# EAGLE board PCB_BALISE_328P (EAGLE 9.5.2)
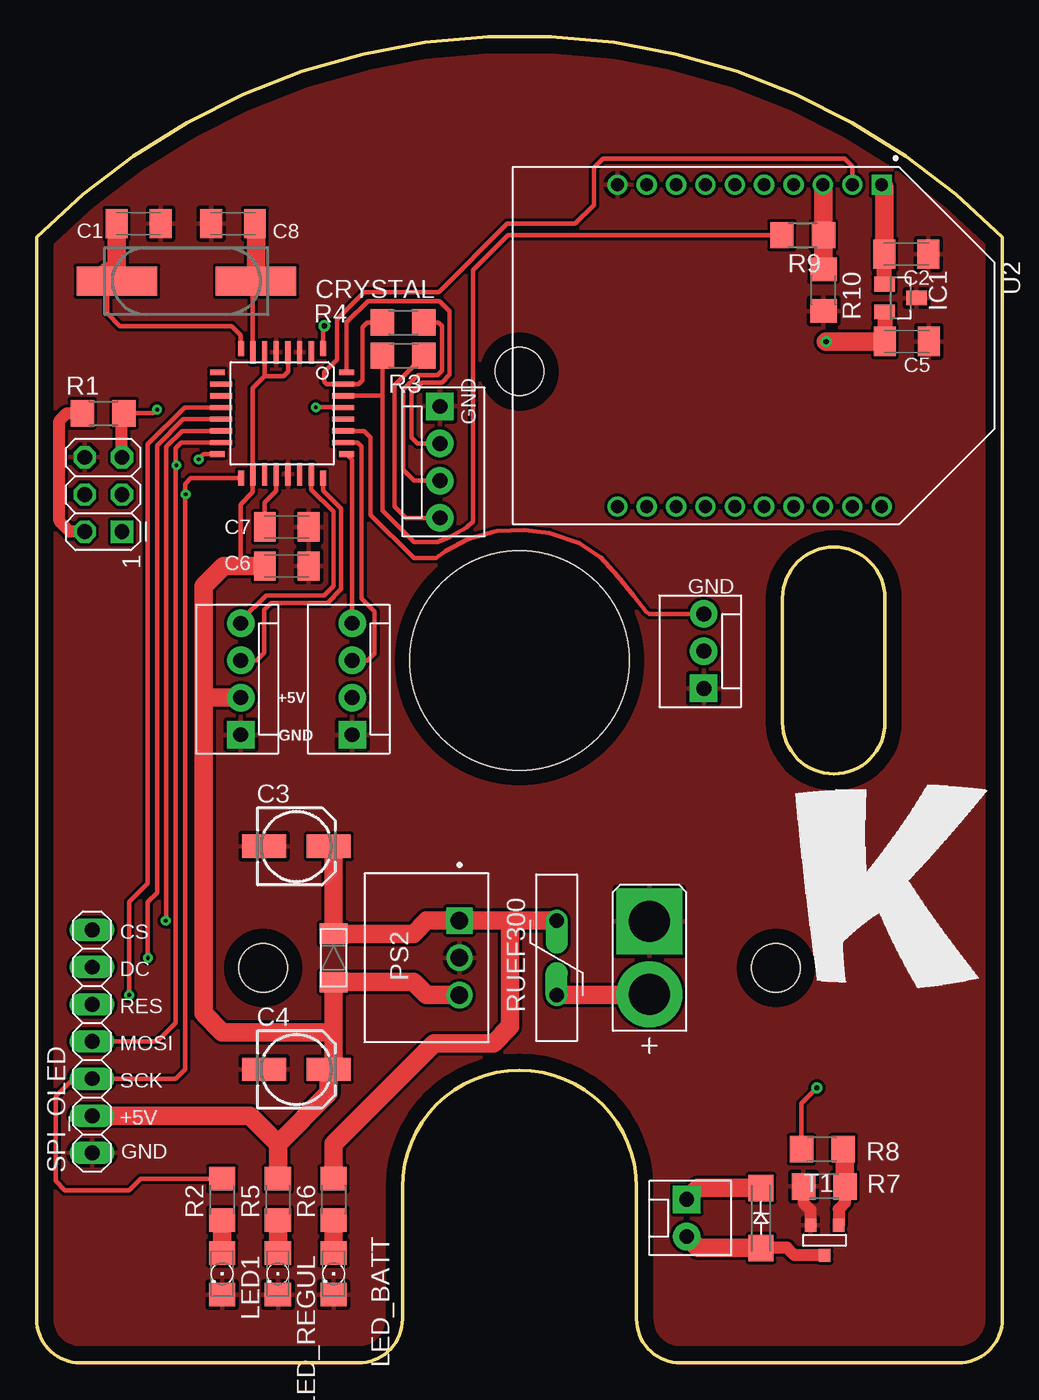
[diagram p0: board, top side]
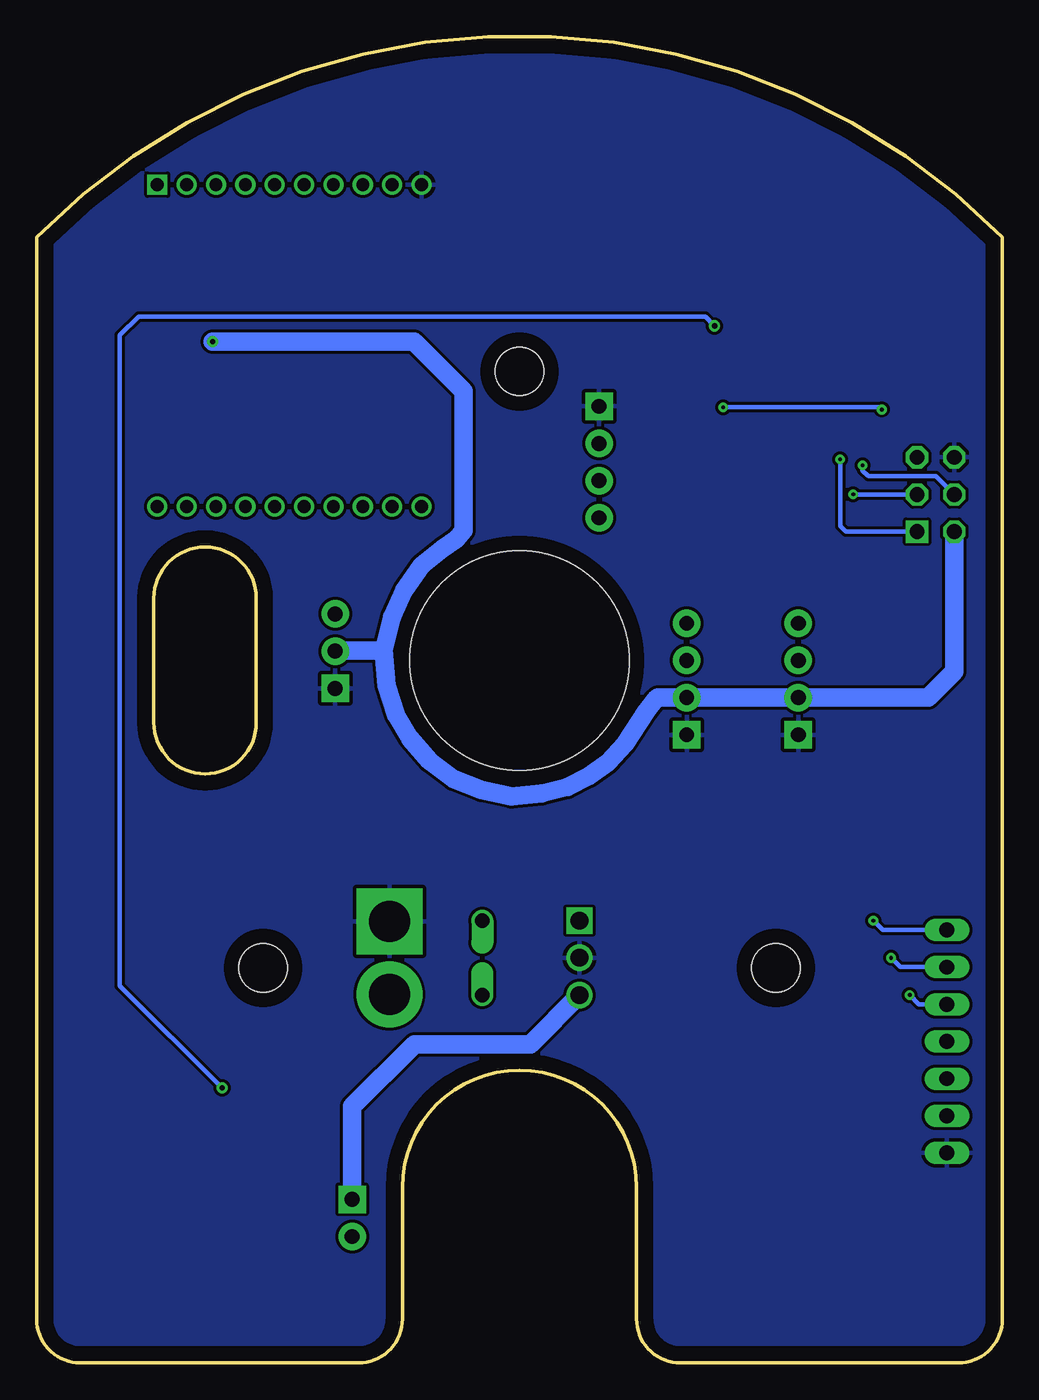
[diagram p1: board, bottom side, seen from below]

Size 66 x 90.63 mm. Coordinates in mm from the lower left corner, seen from the top.
Outline: 41,3 arc90 44,0 63,0 arc90 66,3 66,76.94 arc90 0,76.94 0,3 arc90 3,0 22,0 arc90 25,3 25,12 arc-180 41,12 41,3
Outline: 57.98,43.75 arc-180 50.98,43.75 50.98,52.25 arc-180 57.98,52.25 57.98,43.75
Copper layers (1*16): Top 0.035mm / dielectric 1.5mm / Bottom 0.035mm
Design rules "default *": minimum track width 10mil, minimum drill 6mil, track to track 8mil, track to pad 8mil, pad to pad 8mil, via to via 8mil, smd to smd 8mil, copper to edge 40mil, drill to drill 8mil, minimum pad ring 10mil, minimum via ring 8mil, stop-mask expansion 4mil, vias tented up to drill 0mil, thermal gap 10mil
Holes 3.3 mm at 33,67.75 50.52,27 15.48,27
Holes 15 mm at 33,48

## Footprints (pad centres in the part's own frame; a part is rotated, then mirrored left to right if it is on the bottom)
C1206K = smd 1.5 x 2: 1 -1.5,0; 2 1.5,0
153CLV-0505 = smd 3 x 1.6: + 2.2,0; - -2.2,0
CSM-7X-DU = smd 5.5 x 2: 1 -4.75,0; 2 4.75,0
MINI-SMA = smd 1.4 x 1.9: ANODE 1.65,0; KATHODE -1.65,0
SMA-DO214AC = smd 1.8 x 1.7: A -2.05,0; K 2.05,0
SOT23 = smd 1 x 1.4: 1 -0.95,-1.1; 2 0.95,-1.1; 3 0,1.1
MOLEX-1X4 = drill 1.016 pad 1.88 square: 1 0,0 | drill 1.016 pad 1.88: 2 2.54,0; 3 5.08,0; 4 7.62,0
MOLEX-1X2 = drill 1.016 pad 1.88 square: 1 0,0 | drill 1.016 pad 1.88: 2 2.54,0
MOLEX-1X3 = drill 1.016 pad 1.88 square: 1 0,0 | drill 1.016 pad 1.88: 2 2.54,0; 3 5.08,0
1206 = smd 1.6 x 1.803: A -1.422,0; C 1.422,0
LED_1206 = smd 1.6 x 1.803: A -1.422,0; C 1.422,0
TQFP32-08 = smd 1.016 x 0.406: 1 -4.42,2.8; 8 -4.42,-2.8; 17 4.42,-2.8; 24 4.42,2.8 | smd 1.524 x 0.356: 2 -4.166,2; 3 -4.166,1.2; 4 -4.166,0.4; 5 -4.166,-0.4; 6 -4.166,-1.2; 7 -4.166,-2; 18 4.166,-2; 19 4.166,-1.2; 20 4.166,-0.4; 21 4.166,0.4; 22 4.166,1.2; 23 4.166,2 | smd 0.406 x 1.016: 9 -2.8,-4.42; 16 2.8,-4.42; 25 2.8,4.42; 32 -2.8,4.42 | smd 0.356 x 1.524: 10 -2,-4.166; 11 -1.2,-4.166; 12 -0.4,-4.166; 13 0.4,-4.166; 14 1.2,-4.166; 15 2,-4.166; 26 2,4.166; 27 1.2,4.166; 28 0.4,4.166; 29 -0.4,4.166; 30 -1.2,4.166; 31 -2,4.166
CONV_R-78B5.0-2.0 = drill 1.2 square: 1 -2.54,2.25 | drill 1.2: 2 0,2.25; 3 2.54,2.25
R1206 = smd 1.6 x 1.803: 1 -1.422,0; 2 1.422,0
RUEF300 = drill 1 offset: P$1 -2.54,0; P$2 2.54,0
1X07 = drill 1.016 long: 1 -7.62,0; 2 -5.08,0; 3 -2.54,0; 4 0,0; 5 2.54,0; 6 5.08,0; 7 7.62,0
SOT-23 = smd 0.787 x 0.889: 1 0.025,-1.016; 2 -0.94,1.016; 3 0.991,1.016
2X03 = drill 1.016 square: 1 -2.54,-1.27 | drill 1.016 octagon: 2 -2.54,1.27; 3 0,-1.27; 4 0,1.27; 5 2.54,-1.27; 6 2.54,1.27
MODULE_XBP24CAUIT-001 = drill 0.87 square: 1 -10.998,8.75 | drill 0.87: 2 -10.998,6.744; 3 -10.998,4.737; 4 -10.998,2.731; 5 -10.998,0.724; 6 -10.998,-1.283; 7 -10.998,-3.289; 8 -10.998,-5.296; 9 -10.998,-7.303; 10 -10.998,-9.309; 11 10.998,-9.309; 12 10.998,-7.303; 13 10.998,-5.296; 14 10.998,-3.289; 15 10.998,-1.283; 16 10.998,0.724; 17 10.998,2.731; 18 10.998,4.737; 19 10.998,6.744; 20 10.998,8.75
XT30_FEMALE = drill 2.8 pad 4.5: P$1 -2.5,0 | drill 2.8 pad 4.5 square: P$2 2.5,0

## Placement (x,y rotation side)
C1  22pF  [C1206K]  6.96,77.84 180 top
C2  [C1206K]  59.44,75.76 180 top
C3  10uF  [153CLV-0505]  17.76,35.3 0 top
C4  10uF  [153CLV-0505]  17.76,20.06 0 top
C5  [C1206K]  59.47,69.79 180 top
C6  0,1uF  [C1206K]  17.1,54.44 0 top
C7  0,1uF  [C1206K]  17.1,57.13 0 top
C8  22pF  [C1206K]  13.42,77.85 0 top
CRYSTAL  16Mhz  [CSM-7X-DU]  10.24,73.92 0 top
D1  M7  [MINI-SMA]  20.3,27.68 270 top
D2  GF1  [SMA-DO214AC]  49.51,9.9 90 top
IC1  [SOT23]  59.03,72.77 270 top
J1  [MOLEX-1X4]  27.56,65.36 270 top
J2  [MOLEX-1X2]  44.43,11.17 270 top
J3  [MOLEX-1X4]  13.95,42.92 90 top
J4  [MOLEX-1X4]  21.57,42.92 90 top
J5  [MOLEX-1X3]  45.6,46.09 90 top
LED1  [1206]  12.68,6.09 270 top
LED_BATT  [LED_1206]  20.3,6.09 270 top
LED_REGUL  [LED_1206]  16.49,6.09 270 top
MICRO  ATMEGA328P-AU  [TQFP32-08]  16.78,64.89 270 top
PS2  R-78B5.0-2.0  [CONV_R-78B5.0-2.0]  26.65,27.68 270 top
R1  1K  [R1206]  4.55,64.89 180 top
R2  [R1206]  12.68,11.17 90 top
R3  1k  [R1206]  25.05,68.83 180 top
R4  1k  [R1206]  25.05,71.09 180 top
R5  [R1206]  16.49,11.17 90 top
R6  [R1206]  20.3,11.17 90 top
R7  10k  [R1206]  53.83,12.06 0 top
R8  1K  [R1206]  53.7,14.6 0 top
R9  [R1206]  52.35,77.06 180 top
R10  [R1206]  53.78,73.3 270 top
RU1  RUEF300  [RUEF300]  35.54,27.68 90 top
SPI_OLED  [1X07]  3.79,21.96 90 top
T1  [SOT-23]  53.83,8.38 0 top
U1  AVRISP  [2X03]  4.56,59.34 90 top
U2  XBP24CAUIT-001  [MODULE_XBP24CAUIT-001]  49,69.51 270 top
U$1  LOGO_K  [LOGO_KARIBOU]  52.02,25.6 0 top
U$5  CONN_02_PUIXT30  [XT30_FEMALE]  41.89,27.68 90 top

## Library data of the parts
C1-C8 = rcl; SPICEPREFIX: C
CRYSTAL = 01_FAB_Hello; OC_FARNELL: unknown; OC_NEWARK: unknown
D1 IC1 T1 U1 = fab
D2 = diode
J1 J3 J4 = OPENBOT; PROD_ID: CONN-08186; SF_ID: PRT-08231
J2 = OPENBOT; SF_ID: PRT-09918
J5 = OPENBOT; PROD_ID: CONN-08625; SF_ID: PRT-08096
LED1 = led
LED_BATT LED_REGUL = eagle-ltspice; SPICEMODEL: NONE; SPICEPREFIX: D; SPICETYPE: diode
MICRO = atmega8
PS2 = OPENBOT; AVAILABILITY: Unavailable; DESCRIPTION: 2A DC/DC-Converter 'INNOLINE' SIP3 reg; MF: Recom Power; MP: R-78B5.0-2.0; PACKAGE: SIP-3 Recom Power; PRICE: None
R1-R10 = rcl; SPICEPREFIX: R
RU1 U$5 = OPENBOT
SPI_OLED = pinhead
U2 = OPENBOT; AVAILABILITY: Unavailable; DESCRIPTION: 802.15.4 Transceiver Module 2.4GHz Antenna Not Included, U.FL Through Hole; DIGIKEY-PURCHASE-URL: https://snapeda.com/shop?store=DigiKey&id=1219456; MF: Digi International; MP: XBP24CAUIT-001; PACKAGE: Module Digi International; PRICE: None
U$1 = KARIBOUS

## Nets
+5V: C4.+ C5.2 C6.1 D1.ANODE D2.K IC1.2 J2.1 J3.2 J4.2 J5.2 MICRO.4 MICRO.6 MICRO.18 PS2.3 R1.2 R5.2 SPI_OLED.2 U1.2
CAPT_1: J3.4 MICRO.23
CAPT_2: J3.3 MICRO.24
CAPT_3: J4.4 MICRO.25
CAPT_4: J4.3 MICRO.26
CS: MICRO.14 SPI_OLED.7
DC: MICRO.13 SPI_OLED.6
GND: C1.1 C2.1 C3.- C4.- C5.1 C6.2 C7.2 C8.1 IC1.3 J1.1 J3.1 J4.1 J5.1 LED1.C LED_BATT.C LED_REGUL.C MICRO.3 MICRO.5 MICRO.21 PS2.2 R7.1 R10.2 SPI_OLED.1 T1.2 U1.6 U2.10 U$5.P$2
HALL_SENSOR: J5.3 MICRO.27
MISO: MICRO.16 U1.1
MOSI: MICRO.15 SPI_OLED.4 U1.4
N$1: C7.1 MICRO.20
N$2: C8.2 CRYSTAL.2 MICRO.7
N$3: LED1.A R2.1
N$4: C2.2 IC1.1 U2.1
N$6: J1.2 MICRO.32
N$7: LED_BATT.A R6.1
N$8: RU1.P$1 U$5.P$1
N$9: C1.2 CRYSTAL.1 MICRO.8
N$10: LED_REGUL.A R5.1
N$11: D2.A J2.2 T1.1
N$12: R7.2 R8.2 T1.3
N$13: MICRO.1 R8.1
N$15: R9.1 R10.1 U2.3
RES: MICRO.12 SPI_OLED.5
RST: MICRO.29 R1.1 U1.5
RX: J1.3 R4.1
RX_RAW: MICRO.31 R4.2 U2.2
SCK: MICRO.17 R2.2 SPI_OLED.3 U1.3
TX: J1.4 R3.1
TX_RAW: MICRO.30 R3.2 R9.2
VIN/BATT: C3.+ D1.KATHODE PS2.1 R6.2 RU1.P$2
VREF: U2.14

## Tracks (layer width: path | path; a pad name or v marks a point on that pad's centre or on a via)
+5V  (via drill 0.35)
  Top 0.305: 13.95,54.44 13.95,58.67 14.78,59.49 MICRO.18 14.78,66.61 15.6,67.43 | 15.6,67.43 15.6,69.03 MICRO.6 | MICRO.4 17.18,67.74 16.87,67.43 15.6,67.43
  Top 0.813: U1.2 2.27,56.8 1.55,57.52 1.55,64.38 2.06,64.89 R1.2
  Top 1.016: IC1.2 57.97,71.78 C5.2
  Top 1.27: PS2.3 26.65,25.14 25.76,26.03 D1.ANODE 20.3,22.6 | 20.3,22.6 20.3,20.4 C4.+ 19.96,18.45 16.49,14.98 | 16.49,14.98 R5.2 | J2.1 45.21,11.95 D2.K | 20.3,22.6 12.68,22.6 11.41,23.87 11.41,45.46 | 11.41,45.46 J3.2 | 11.41,45.46 11.41,53.08 12.77,54.44 13.95,54.44 C6.1 | SPI_OLED.2 14.59,16.89 16.49,14.98 | v53.95,69.79 C5.2
  Bottom 1.27: PS2.3 32.26,21.78 40.17,21.78 44.43,17.52 J2.1 | U1.2 3.29,47.23 5.06,45.46 J3.2 J4.2 23.55,45.46 23.73,45.28 24.34,44.55 25.78,42.3 26.95,41.04 28.25,40.1 29.72,39.34 31.5,38.91 33.53,38.7 35.59,39.13 37.5,39.9 39.15,41.12 40.49,42.67 41.43,44.27 42.07,46.3 42.28,48.69 | J5.2 45.55,48.69 42.28,48.69 | 42.28,48.69 41.71,50.95 40.9,52.77 39.71,54.48 38.31,55.59 37.29,56.31 36.81,56.89 36.81,66.41 40.19,69.79 v53.95,69.79
CAPT_1
  Top 0.305: J3.4 13.95,50.72 15.68,52.45 19.66,52.45 20.3,53.08 20.3,58.16 18.78,59.68 MICRO.23
CAPT_2
  Top 0.305: J3.3 15.04,48 15.55,48.51 15.55,51.45 16.03,51.94 19.88,51.94 20.81,52.87 20.81,58.37 19.58,59.6 MICRO.24
CAPT_3
  Top 0.305: MICRO.25 21.57,61.71 J4.4
CAPT_4
  Top 0.305: J4.3 22.61,48 23.09,48.48 23.09,51.35 22.2,52.24 22.2,62.61 21.92,62.89 MICRO.26
CS  (via drill 0.25)
  Top 0.305: MICRO.14 9.95,63.69 8.87,62.61 8.87,30.22 v8.82,30.22
  Bottom 0.305: v8.82,30.22 8.18,29.59 SPI_OLED.7
DC  (via drill 0.25)
  Top 0.305: MICRO.13 10.03,64.49 8.23,62.69 8.23,32.12 7.6,31.49 v7.6,27.68
  Bottom 0.305: v7.6,27.68 6.96,27.05 SPI_OLED.6
GND
  Top 0.813: R7.1 52.41,10.94 52.89,10.46 T1.2
  pour Bottom: -3.83,77.84 10.14,91.81 42.52,91.81 53.32,91.81 67.92,77.21 68.56,76.58 68.56,-1.53 -0.66,-1.53 -1.29,-0.9 -1.29,75.31
  pour Top: -1.92,77.21 12.68,91.81 54.59,91.81 68.56,77.84 68.56,75.94 68.56,-0.9 67.92,-1.53 -0.66,-1.53 -0.66,75.94
HALL_SENSOR
  Top 0.305: MICRO.27 22.39,63.69 22.84,63.24 22.84,57.94 25.79,54.98 27.29,54.98 27.95,55.47 29.47,56.31 31.43,56.84 33.36,56.91 35.06,56.71 37.06,56.03 38.56,55.04 39.73,53.74 40.77,52.45 41.64,51.35 41.89,51.17 J5.3
MISO  (via drill 0.25)
  Top 0.305: MICRO.16 11.42,62.09 v11.08,61.74
  Bottom 0.305: v11.08,61.74 11.08,57.2 10.68,56.8 U1.1
MOSI  (via drill 0.25)
  Top 0.305: MICRO.15 9.87,62.89 9.5,62.52 9.5,61.34 | SPI_OLED.4 8.23,21.96 9.5,23.23 9.5,61.34 | v9.56,61.34 9.5,61.34
  Bottom 0.305: U1.4 4.55,60.6 9.18,60.6 9.56,60.98 v9.56,61.34
N$1
  Top 0.305: MICRO.20 16.38,59.57 15.6,58.79 C7.1
N$2
  Top 0.305: CRYSTAL.2 14.78,73.71 MICRO.7
  Top 1.27: C8.2 14.99,77.77 CRYSTAL.2
N$3
  Top 1.27: R2.1 LED1.A
N$4
  Top 1.016: IC1.1 C2.2
  Top 1.27: C2.2 57.94,80.32 U2.1
N$6
  Top 0.305: MICRO.32 21.2,71.12 22.64,72.56 27.54,72.56 28.23,71.88 28.23,67.53 27.69,67 26.34,67 25.61,66.26 25.61,63.24 26.02,62.83 J1.2
N$7
  Top 1.27: R6.1 LED_BATT.A
N$8
  Top 1.27: U$5.P$1 41.85,25.14 RU1.P$1
N$9
  Top 0.305: MICRO.8 13.95,69.33 13.95,70.22 13.32,70.86 5.7,70.86 4.83,71.72 4.83,73.95
  Top 1.27: CRYSTAL.1 5.46,73.95 | 5.46,73.95 4.83,74.59 4.83,73.95 | 5.46,73.95 C1.2
N$10
  Top 1.27: R5.1 LED_REGUL.A
N$11
  Top 0.813: D2.A 49.53,7.87 51.29,7.87 51.8,7.36 T1.1
  Top 1.27: D2.A 45.21,7.85 J2.2
N$12
  Top 0.813: R7.2 55.25,10.94 54.82,10.51 T1.3
  Top 1.27: R7.2 55.25,14.47 R8.2
N$13  (via drill 0.35)
  Top 0.305: MICRO.1 19.58,70.77 v19.66,70.86 | R8.1 52.28,17.75 v53.32,18.79
  Bottom 0.305: v19.66,70.86 20.3,71.5 59.03,71.5 60.3,70.22 60.3,25.77 v53.32,18.79
N$15
  Top 1.27: U2.3 53.78,80.47 R9.1 R10.1
RES  (via drill 0.25)
  Top 0.305: MICRO.12 10.11,65.29 7.6,62.77 7.6,32.76 6.33,31.49 v6.33,25.14
  Bottom 0.305: v6.33,25.14 5.7,24.5 SPI_OLED.5
RST  (via drill 0.25)
  Top 0.305: R1.1 7.98,64.89 v8.23,65.14 | v19.08,65.3 MICRO.29
  Top 0.813: U1.5 5.83,64.75 R1.1
  Bottom 0.305: v8.23,65.14 8.39,65.3 v19.08,65.3
RX
  Top 0.305: R4.1 27.46,71.09 27.69,70.86 27.69,67.81 27.39,67.51 26.07,67.51 25.05,66.49 25.05,61.03 25.8,60.28 J1.3
RX_RAW
  Top 0.305: R4.2 22.59,71.09 22.28,70.78 22.28,67.15 22.02,66.89 MICRO.31 19.83,66.89 19.66,67.05 19.66,67.69 20.53,68.55 20.53,71.32 22.38,73.17 27.49,73.17 32.16,77.84 36.81,77.84 38.08,79.11 38.08,81.66 38.72,82.29 55.23,82.29 55.75,81.77 U2.2
SCK  (via drill 0.25)
  Top 0.305: MICRO.17 10.54,60.47 10.14,60.06 10.14,59.41 | 10.14,59.41 10.14,20.06 9.5,19.43 SPI_OLED.3 2.52,19.43 1.3,18.2 1.3,12.44 1.93,11.8 6.33,11.8 7.12,12.59 R2.2 | v10.19,59.35 10.14,59.41
  Bottom 0.305: U1.3 10.18,59.34 v10.19,59.35
TX
  Top 0.305: R3.1 24.47,66.82 24.47,58.52 25.24,57.74 J1.4
TX_RAW
  Top 0.305: R3.2 23.63,66.09 MICRO.30 23.63,66.09 23.63,58.24 25.79,56.08 27.39,56.08 28.23,56.43 29.39,57.07 29.82,57.5 29.82,74.67 32.21,77.06 R9.2
VIN/BATT
  Top 1.27: RU1.P$2 32.37,30.22 | 32.37,30.22 PS2.1 26.65,30.22 25.76,29.33 D1.KATHODE 20.3,34.96 C3.+ | R6.2 20.3,14.98 27.16,21.84 31.22,21.84 32.37,22.98 32.37,30.22

## Text on the board
tNames: GND | GND | +5V | GND | CS | DC | RES | MOSI | SCK | +5V | GND